# Altium PCB EVAL-AD7124.PcbDoc (part 1 of 2)
Units mil, origin at the board's own origin, x right, y up, seen from the top; angles counter-clockwise.
Board outline 2362.21 x 1574.8 mil, 4 copper layers (Top Layer, GND Layer, PWR Layer, Bottom Layer), stack 30.635 mil thick; 93 components, 57 nets, 234 pads, 171 vias.
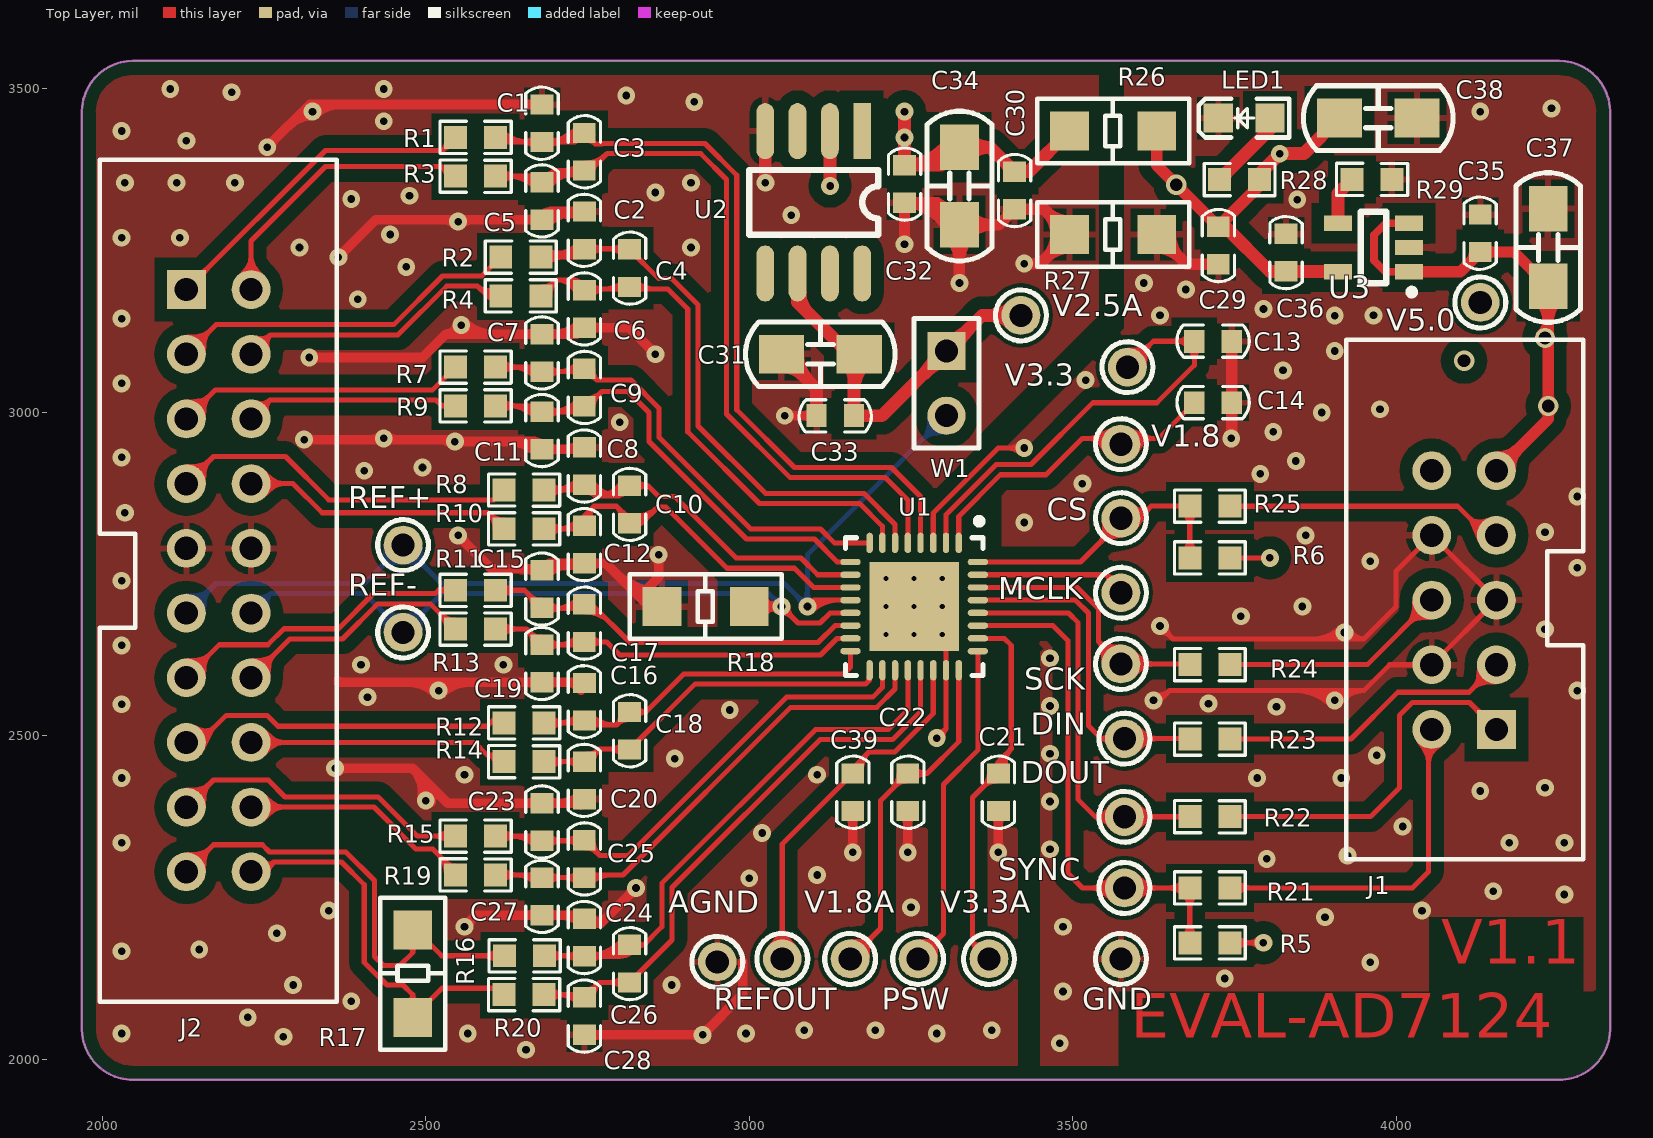
[diagram p0: Top Layer view]
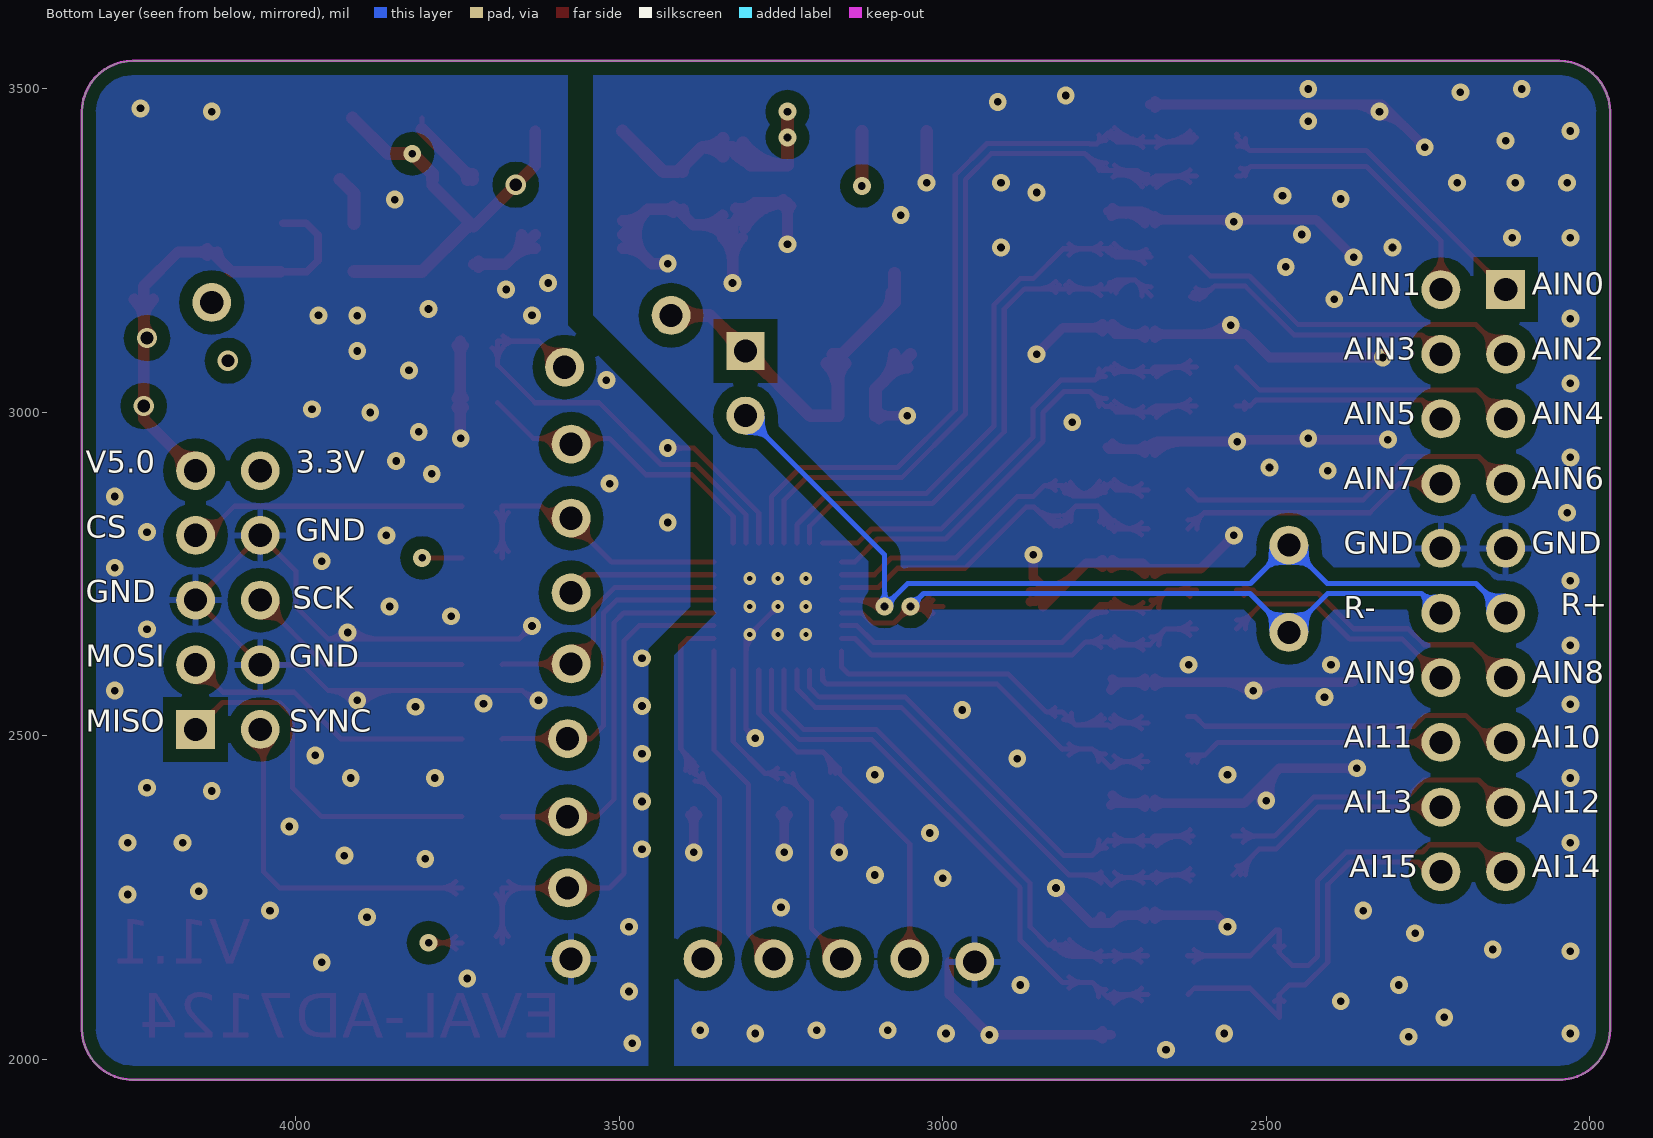
[diagram p1: Bottom Layer view, seen from below]
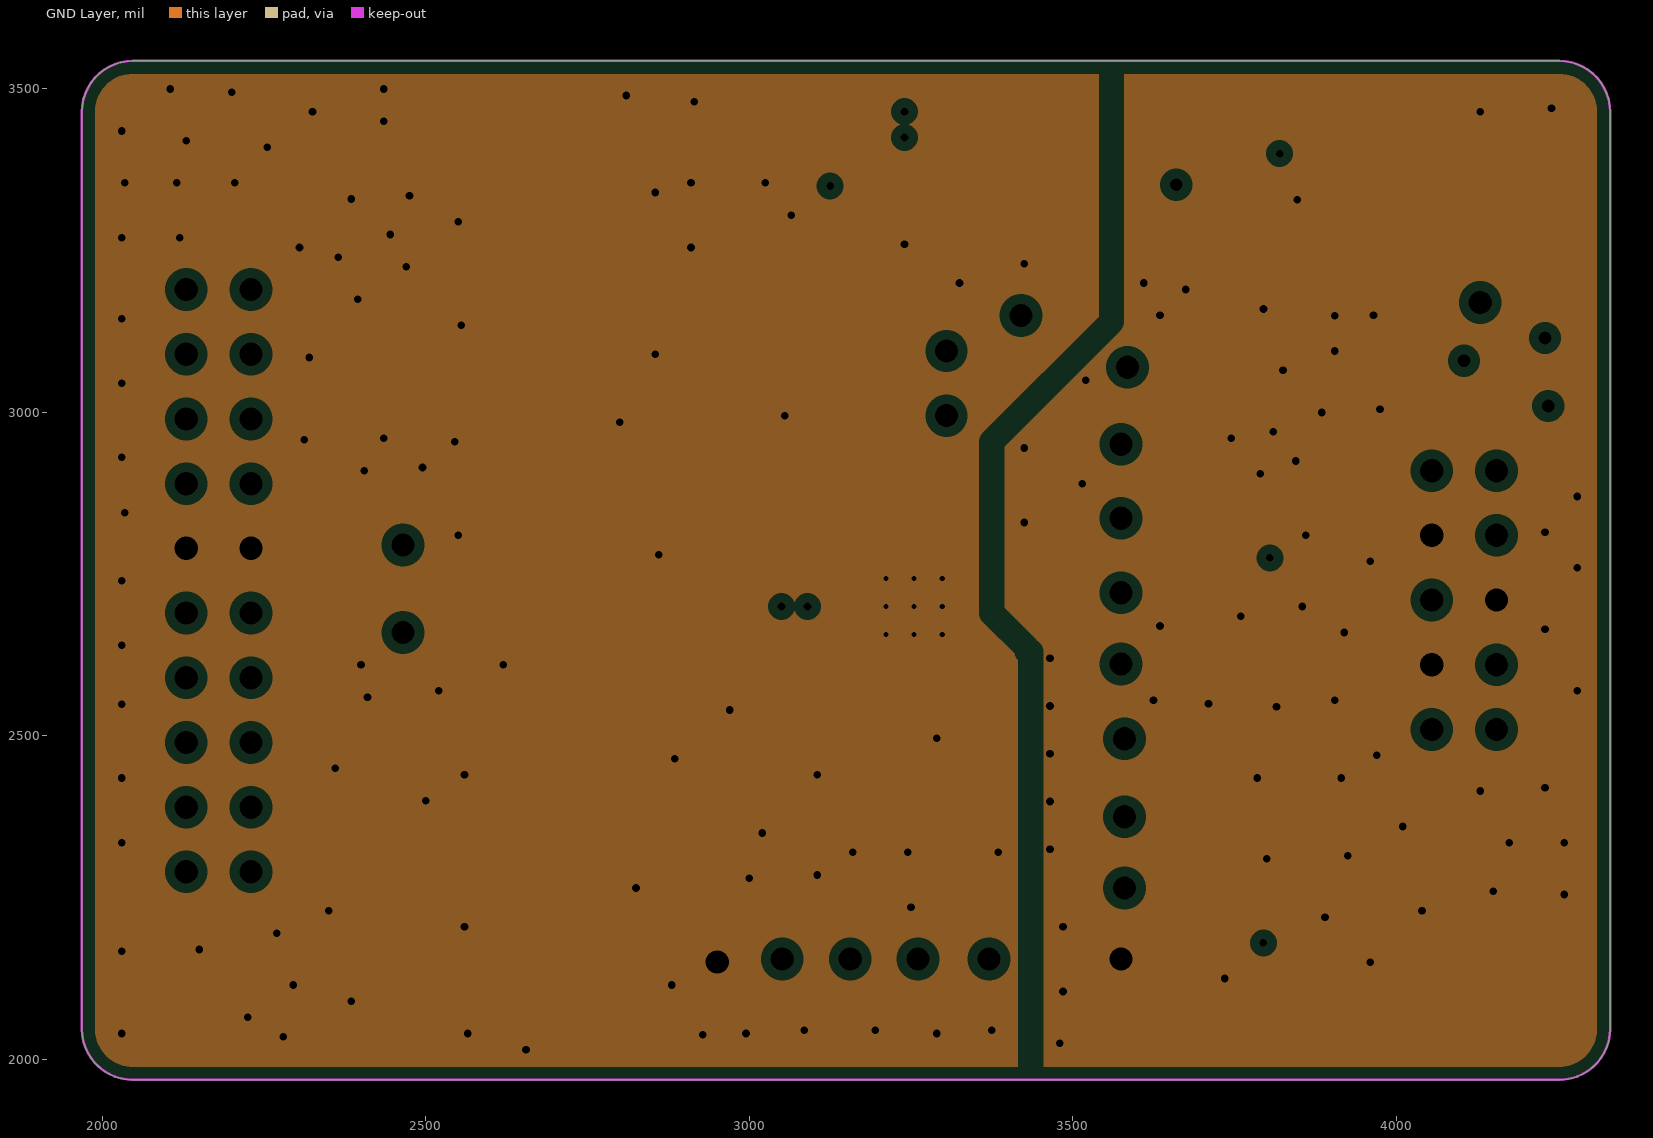
[diagram p2: GND Layer, clearances drawn from the general rule]
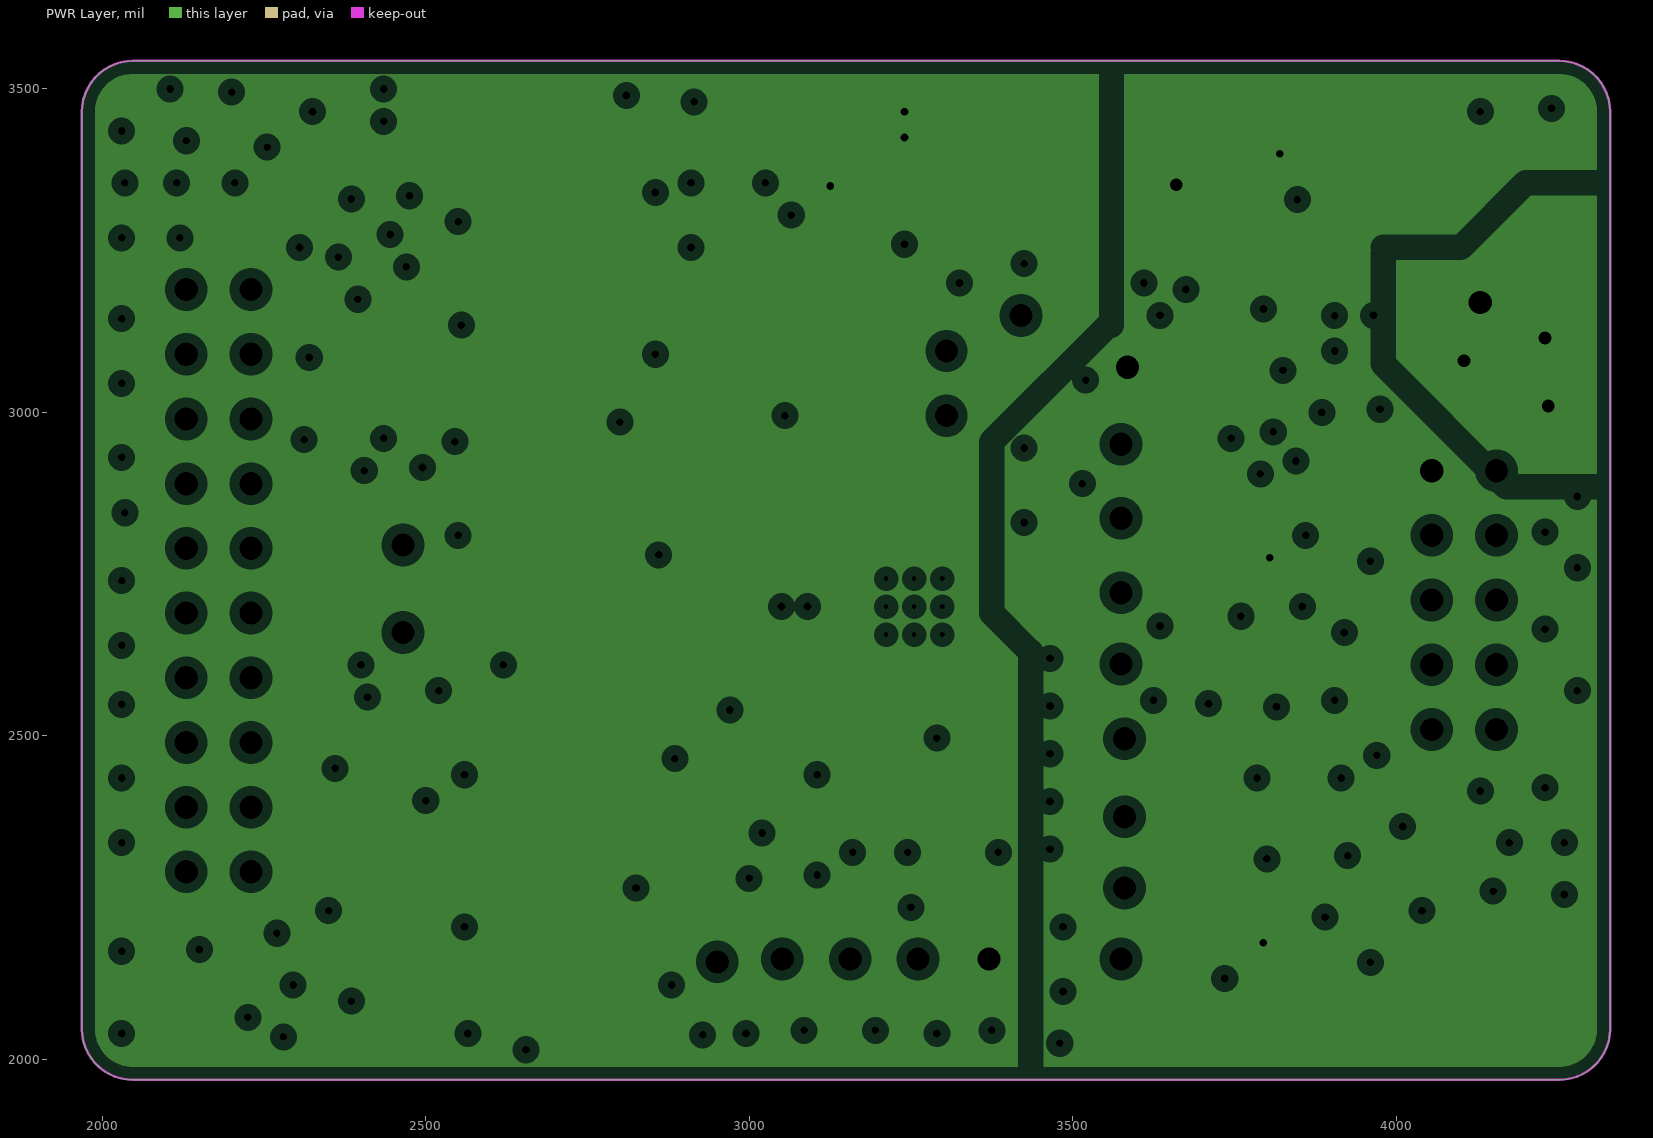
[diagram p3: PWR Layer, clearances drawn from the general rule]

## Layer stack, top to bottom
Top Solder: solder mask 0.4, Solder Resist, Dk 3.5
Top Layer: signal copper 1.4
Dielectric 1: core 10, FR-4, Dk 4.2
GND Layer: plane copper 1.4173, net (Multiple Nets)
Dielectric 4: prepreg 5, Dk 4.2
PWR Layer: plane copper 1.4173, net (Multiple Nets)
Dielectric 3: core 10, Dk 4.2
Bottom Layer: signal copper 1.4
Bottom Solder: solder mask 0.4, Solder Resist, Dk 3.5

## Board outline
2047.24,1968.5 cw(c2047.24,2047.24) 1968.5,2047.24 1968.5,3464.57 cw(c2047.24,3464.57) 2047.24,3543.31 4251.97,3543.31 cw(c4251.97,3464.57) 4330.71,3464.57 4330.71,2047.24 cw(c4251.97,2047.24) 4251.97,1968.5

## Design rules (kind name [scope] priority, off if disabled: settings)
Clearance Clearance_1 [InPolygon] p1: gap=19.68 ignorepadtopadclearanceinfootprint=FALSE except(0: Arc-Hole Track-Hole SMDPad-Hole THPad-Hole Via-Hole Fill-Hole Poly-Hole Region-Hole Text-Hole)
Clearance [All] p2: gap=7.87 ignorepadtopadclearanceinfootprint=FALSE except(0: Arc-Hole Track-Hole SMDPad-Hole THPad-Hole Via-Hole Fill-Hole Poly-Hole Region-Hole Text-Hole)
ComponentClearance [All] p1 off: gap=10 collisioncheckmode=3 verticalgap=3.94 showdistances=FALSE
DiffPairsRouting [All] p1: maxlimit=10 minlimit=7.87 mostfreqgap=7.87 toplayer_minwidth=5.91 toplayer_maxwidth=15 toplayer_prefwidth=7.87 bottomlayer_minwidth=5.91 bottomlayer_maxwidth=15 bottomlayer_prefwidth=7.87 maxuncoupledlength=500
PlaneClearance [All] p1: clearance=15
PlaneConnect [All] p1: planeconnectstyle=Direct reliefexpansion=20 reliefentries=4 reliefconductorwidth=10 reliefairgap=10
PolygonConnect PolygonConnect_1 [IsVia] p1: connectstyle=Direct reliefconductorwidth=10 reliefentries=4 polygonreliefangle="90 Angle" airgapwidth=10
PolygonConnect [All] p2: connectstyle=Relief reliefconductorwidth=10 reliefentries=4 polygonreliefangle="90 Angle" airgapwidth=10
RoutingVias [All] p1: holewidth=11.81 width=27.56 viastyle="Through Hole" minholewidth=7.87 minwidth=15.75 maxholewidth=28 maxwidth=39.37
SilkToSilkClearance [All] p1 off: silktosilkclearance=3.94
SilkToSolderMaskClearance [IsPad] p1 off: minsilkscreentomaskgap=10 clearancetoexposedcopper=TRUE
SolderMaskExpansion [All] p1: expansion=4
Width [All] p1: maxlimit=39.37 minlimit=5.91 preferedwidth=7.87
24 further rules are at their usual default settings.

## Components (designator, comment, footprint, x,y, rotation, side; value= is the part's Value field where it differs from the comment)
AGND "TP" "TP -DRILL" 2950.63,2150.76 r0 top
C1 "15pF" C0603 2680,3475 r270 top value=102
C2 "15pF" C0603 2745.47,3309.55 r270 top value=102
C3 "15pF" C0603 2745,3375 r90 top value=104
C4 "15pF" C0603 2815,3195 r90 top value=104
C5 "15pF" C0603 2680,3355 r270 top value=102
C6 "15pF" C0603 2745.47,3188.09 r270 top value=102
C7 "15pF" C0603 2680,3120 r270 top value=102
C8 "15pF" C0603 2745.47,2945.18 r270 top value=102
C9 "15pF" C0603 2745,3010.64 r90 top value=104
C10 "15pF" C0603 2815,2830 r90 top value=104
C11 "15pF" C0603 2680,3000 r270 top value=102
C12 "15pF" C0603 2745.47,2823.73 r270 top value=102
C13 "15pF" C0603 3745,3110 r180 top value=104
C14 "15pF" C0603 3745,3015 r180 top value=104
C15 "15pF" C0603 2680,2755 r270 top value=102
C16 "15pF" C0603 2745.47,2580.82 r270 top value=102
C17 "15pF" C0603 2745,2646.27 r90 top value=104
C18 "15pF" C0603 2815,2480 r90 top value=104
C19 "15pF" C0603 2680,2640 r270 top value=102
C20 "15pF" C0603 2745.47,2459.36 r270 top value=102
C21 "15pF" C0603 3385,2385 r90 top value=104
C22 "15pF" C0603 3245,2385 r90 top value=104
C23 "15pF" C0603 2680,2395 r270 top value=102
C24 "15pF" C0603 2745.47,2216.45 r270 top value=102
C25 "15pF" C0603 2745,2281.91 r90 top value=104
C26 "15pF" C0603 2815,2120 r90 top value=104
C27 "15pF" C0603 2680,2280 r270 top value=102
C28 "15pF" C0603 2745.47,2095 r270 top value=102
C29 "15pF" C0603 3725,3230 r90 top value=104
C30 "15pF" C0603 3410,3315 r90 top value=104
C31 "15pF" C1206 3110,3090 r0 top value=106
C32 "15pF" C0603 3240,3325 r90 top value=104
C33 "15pF" C0603 3105,2995 r0 top value=104
C34 "15pF" C1206 3325,3350 r90 top value=106
C35 "15pF" C0603 4130,3305 r270 top value=104
C36 "15pF" C0603 3830,3275 r270 top value=104
C37 "15pF" C1206 4235,3255 r270 top value=106
C38 "15pF" C1206 3972.3,3455 r180 top value=106
C39 "15pF" C0603 3160,2385 r90 top value=104
CS "TP" "TP -DRILL" 3574.62,2836.7 r90 top
DIN "TP" "TP -DRILL" 3580,2495.83 r90 top
DOUT "TP" "TP -DRILL" 3580,2375.04 r90 top
GND "TP" "TP -DRILL" 3574.62,2155.38 r0 top
J1 "Header 5X2" IDC10M 4105,2710 r90 top
J2 "Header 10X2" IDC20M 2180,2740 r270 top
LED1 "LED1" D0805 3765,3455 r180 top
MCLK "TP" "TP -DRILL" 3574.62,2721.28 r0 top
PSW "TP" "TP -DRILL" 3261.02,2155.38 r0 top
R1 "1K" R0603 2605,3425 r180 top
R2 "1K" R0603 2675,3240 r180 top
R3 "1K" R0603 2605,3365 r180 top
R4 "1K" R0603 2675,3180 r180 top
R5 "10K" R0603 3740,2180 r180 top
R6 "10K" R0603 3740,2775 r180 top
R7 "1K" R0603 2605,3070 r180 top
R8 "1K" R0603 2680,2880 r180 top
R9 "1K" R0603 2605,3010 r180 top
R10 "1K" R0603 2680,2820 r180 top
R11 "1K" R0603 2605,2725 r180 top
R12 "1K" R0603 2680,2520 r180 top
R13 "1K" R0603 2605,2665 r180 top
R14 "1K" R0603 2680,2460 r180 top
R15 "1K" R0603 2605,2345 r180 top
R16 "1K" R0603 2680.65,2160 r180 top
R17 "2K(NC)" R1206 2470,2125 r270 top
R18 "0R" R1206 2940,2690 r0 top
R19 "1K" R0603 2605,2285 r180 top
R20 "1K" R0603 2680,2100 r180 top
R21 "33R" R0603 3740,2265 r180 top
R22 "33R" R0603 3740,2375 r180 top
R23 "33R" R0603 3740,2495 r180 top
R24 "33R" R0603 3740,2610 r180 top
R25 "33R" R0603 3740,2855 r180 top
R26 "0R" R1206 3570,3425 r0 top
R27 "0R" R1206 3570,3265 r0 top
R28 "1K5" R0603 3730,3360 r0 top
R29 "0" R0603 3990.61,3360 r180 top
REF+ "TP" "TP -DRILL" 2465,2795 r90 top
REF- "TP" "TP -DRILL" 2465,2660 r90 top
REFOUT "TP" "TP -DRILL" 3051.02,2155.38 r0 top
SCK "TP" "TP -DRILL" 3574.62,2611.25 r90 top
SYNC "TP" "TP -DRILL" 3580,2265 r0 top
U1 "AD7124-8BCPZ" QFN32 3255,2700 r270 top
U2 "ADR4525BRZ" SO-8 3175,3435 r270 top
U3 "TPS78233" SOT-23-5 3965,3255 r0 top
V1.8 "TP" "TP -DRILL" 3574.62,2951.04 r0 top
V1.8A "TP" "TP -DRILL" 3156.02,2155.38 r0 top
V2.5A "TP" "TP -DRILL" 3420,3150 r0 top
V3.3 "TP" "TP -DRILL" 3584.62,3070 r0 top
V3.3A "TP" "TP -DRILL" 3370.63,2155.38 r0 top
V5.0 "TP" "TP -DRILL" 4130,3170 r90 top
W1 "Jumper" HDR1X2 3305,3095 r270 top

## Footprints (in the part's own frame and the unit in brackets; to place one, negate y for a bottom-side part, rotate by r counter-clockwise, add the part's x,y. Pads: shape width x height; smd on the part's side, far side on the other; paste and mask are expansions set on the pad)
C0603 [mm]
  rect 0.8x0.9 smd: 1(-0.025,0) 2(1.448,0)
  silkscreen extent -0.71,-0.64 2.13,0.63
C1206 [mil]
  rect 70x60 smd: 1(-60,0) 2(60,0)
  silkscreen extent -116,-50 116,50
D0805 [mil]
  rect 45x45 smd: 1(-40,0) 2(40,0)
  silkscreen extent -70,-30 70,30, body extent -39,-24 39,24, height 49
HDR1X2 [mm] "Connector; Header; 2 Position"
  rect 1.5x1.5 hole 0.9: 1(0,0)
  round 1.5 hole 0.9: 2(2.54,0)
  silkscreen extent -1.27,-1.27 3.81,1.27
IDC10M [mil]
  rect 60x60 hole 36: 1(-200,-50)
  round 60 hole 36: 2(-200,50) 3(-100,-50) 4(-100,50) 5(0,-50) 6(0,50) 7(100,-50) 8(100,50) 9(200,-50) 10(200,50)
  silkscreen extent -401,-184 402,182
IDC20M [mil] "简牛端子"
  rect 60x60 hole 36: 1(-450,-50)
  round 60 hole 36: 2(-450,50) 3(-350,-50) 4(-350,50) 5(-250,-50) 6(-250,50) 7(-150,-50) 8(-150,50) 9(-50,-50) 10(-50,50) 11(50,-50) 12(50,50) 13(150,-50) 14(150,50) 15(250,-50) 16(250,50) 17(350,-50) 18(350,50) 19(450,-50) 20(450,50)
  silkscreen extent -651,-184 651,182
QFN32 [mm] "QFN, 32-Leads, Body 5.00x5.00mm, Pitch 0.50mm, Thermal Pad 3.65x3.65mm, IPC Medium Density"
  oval 0.8x0.25 smd: 1(-2.5,1.75) 2(-2.5,1.25) 3(-2.5,0.75) 4(-2.5,0.25) 5(-2.5,-0.25) 6(-2.5,-0.75) 7(-2.5,-1.25) 8(-2.5,-1.75) 17(2.5,-1.75) 18(2.5,-1.25) 19(2.5,-0.75) 20(2.5,-0.25) 21(2.5,0.25) 22(2.5,0.75) 23(2.5,1.25) 24(2.5,1.75)
  oval 0.25x0.8 smd: 9(-1.75,-2.5) 10(-1.25,-2.5) 11(-0.75,-2.5) 12(-0.25,-2.5) 13(0.25,-2.5) 14(0.75,-2.5) 15(1.25,-2.5) 16(1.75,-2.5) 25(1.75,2.5) 26(1.25,2.5) 27(0.75,2.5) 28(0.25,2.5) 29(-0.25,2.5) 30(-0.75,2.5) 31(-1.25,2.5) 32(-1.75,2.5)
  rect 3.5x3.5 smd: 33(0,0)
  silkscreen extent -3.47,-2.7 2.7,2.7, body extent -2.55,-2.55 2.55,2.55, height 0.8
R0603 [mm]
  rect 0.9x0.9 smd: 1(-0.076,-0.006) 2(1.499,-0.006)
  silkscreen extent -0.69,-0.64 2.1,0.63
R1206 [mil]
  rect 60x60 smd: 1(-75,10) 2(60,10)
  silkscreen extent -125,-40 110,60
SO-8 [mm]
  rect 2.2x0.7 smd: 1(0.006,-0.007)
  oval 2.2x0.7 smd: 2(0.006,-1.277) 3(0.006,-2.547) 4(0.006,-3.817) 5(5.594,-3.817) 6(5.594,-2.547) 7(5.594,-1.277) 8(5.594,-0.007)
  silkscreen extent 1.53,-4.45 4.07,0.63
SOT-23-5 [mm]
  rect 1.1x0.6 smd: 1(1.4,-0.95) 2(1.4,0) 3(1.4,0.95) 4(-1.4,0.95) 5(-1.4,-0.95)
  silkscreen extent -0.5,-1.87 1.63,1.4
"TP -DRILL" [mil]
  round 60 hole 35.98: 1(0,0)
  silkscreen extent -39,-39 39,39

## Part data
AGND CS DIN DOUT GND MCLK PSW REF+ REF- REFOUT SCK SYNC V1.8 V1.8A V2.5A V3.3 V3.3A V5.0: library part Single_Hole
C1 C2 C3 C4 C5 C6 C7 C8 C9 C10 C11 C12 C13 C14 C15 C16 C17 C18 C19 C20 C21 C22 C23 C24 C25 C26 C27 C28 C29 C30 C31 C32 C33 C34 C35 C36 C37 C38 C39: library part Cap, "Capacitor", LatestRevisionDate=17-Jul-2002, LatestRevisionNote="Re-released for DXP Platform.", PackageDescription="Radial Cap, Thru-Hole; 2 Leads; 0.3 in Pin Spacing", PackageReference=RAD-0.3, Published=8-Jun-2000, Publisher="Altium Limited"
J1: "Header, 5-Pin, Dual row", LatestRevisionDate=17-Jul-2002, LatestRevisionNote="Re-released for DXP Platform.", Publisher="Altium Limited"
J2: "Header, 10-Pin, Dual row", LatestRevisionDate=17-Jul-2002, LatestRevisionNote="Re-released for DXP Platform.", Publisher="Altium Limited"
LED1: library part LED2, "Typical RED, GREEN, YELLOW, AMBER GaAs LED", LatestRevisionDate=17-Jul-2002, LatestRevisionNote="Re-released for DXP Platform.", PackageDescription="SM LED; 2 Flat Leads", PackageReference=3.2X1.6X1.1, PackageVersion=Feb-2002, Published=8-Jun-2000, Publisher="Altium Limited"
R1 R2 R3 R4 R5 R6 R7 R8 R9 R10 R11 R12 R13 R14 R15 R16 R17 R18 R19 R20 R21 R22 R23 R24 R25 R26 R27 R28 R29: library part Res1, "Resistor", LatestRevisionDate=17-Jul-2002, LatestRevisionNote="Re-released for DXP Platform.", PackageDescription="Axial Device, Thru-Hole; 2 Leads; 0.3 in Pin Spacing", PackageReference=AXIAL-0.3, Published=8-Jun-2000, Publisher="Altium Limited"
U3: library part CAT6219-330
W1: "Jumper Wire", LatestRevisionDate=17-Jul-2002, LatestRevisionNote="Re-released for DXP Platform.", PackageDescription="Radial Cap, Thru-Hole; 2 Leads; 0.2 in Pin Spacing", PackageReference=RAD-0.2, Published=24-Mar-1999, Publisher="Altium Limited"

## Via types
v1: diameter 27.56, hole 11.81, Top Layer to Bottom Layer, 158 vias
v2: diameter 19.68, hole 7.87, Top Layer to Bottom Layer, 9 vias
v3: diameter 31.5, hole 19.68, Top Layer to Bottom Layer, 4 vias

## Nets (pads, with @x,y where several pads share a name; then routed paths per layer and width w, separated by ;. In a path a pad name is that pad's centre, name@x,y a point inside that pad or via, vN(x,y) a via of type N, cw(c..) or ccw(c..) an arc to the next point about the centre after c; other vN are vias at no path point)
AD_CS: CS.1 R6.2 R25.2 U1.32 | length 553.2
  Top Layer w7.87: U1.32@3353.43,2768.9 3512.2,2768.9 CS.1@3580,2836.7 ; CS.1@3574.62,2836.7 CS.1@3580,2836.7 ; R6.2@3671.26,2784.98 ccw(c3647.73,2808.5) 3681,2808.5 ccw(c3714.27,2808.5) R6.2@3690.74,2784.98 ; R25.2@3671.26,2845.49 cw(c3647.73,2821.97) 3681,2821.97 cw(c3714.27,2821.97) R25.2@3690.74,2845.49 ; R6.2@3681,2775.24 R25.2@3681,2855.24 3621.29,2855.24 3602.76,2836.7 CS.1@3580,2836.7
AD_DIN: DIN.1 R23.2 U1.29 | length 518.5
  Top Layer w7.87: U1.29@3353.43,2709.84 3504.41,2709.84 3524.25,2690 3524.25,2515.75 3544.17,2495.83 DIN.1@3580,2495.83 3680.41,2495.83 R23.2@3681,2495.24
AD_DOUT: DOUT.1 R22.2 U1.28 | length 618.4
  Top Layer w7.87: U1.28@3353.43,2690.16 3493.35,2690.16 3508.5,2675 3508.5,2401.5 3534.96,2375.04 DOUT.1@3580,2375.04 3680.8,2375.04 R22.2@3681,2375.24
AD_SCK: R24.2 SCK.1 U1.30 | length 406.7
  Top Layer w7.87: U1.30@3353.43,2729.53 3507,2729.53 3540,2696.52 3540,2645.87 SCK.1@3574.62,2611.25 3679.99,2611.25 R24.2@3681,2610.24
AD_SYNC: R5.2 R21.2 SYNC.1 U1.27 | length 948.3
  Top Layer w7.87: U1.27@3353.43,2670.47 3469.53,2670.47 3492.76,2647.24 3492.76,2287.24 3515,2265 SYNC.1@3580,2265 3680.76,2265 R21.2@3681,2265.24 R5.2@3681,2180.24 ; 3647.16,2265 ccw(c3647.16,2299.07) R21.2@3671.26,2274.98 ; 3648.3,2265 cw(c3648.3,2232.54) 3671.26,2255.49 cw(c3647.73,2231.97) 3681,2231.97 cw(c3714.27,2231.97) R21.2@3690.74,2255.49 ; R5.2@3671.26,2189.98 ccw(c3647.73,2213.5) 3681,2213.5 ccw(c3714.27,2213.5) R5.2@3690.74,2189.98
AGND: AGND.1 C1.1 C2.1 C5.2 C6.2 C7.1 C8.1 C11.2 C12.2 C15.1 C16.1 C19.2 C20.2 C21.1 C22.1 C23.1 C24.1 C27.2 C28.2 C30.1 C31.1 C32.1 C33.1 C34.1 C39.1 J2.9 J2.10 R18.1 R27.1 U1.23 U1.33 U2.4 | length 7860.6
  Top Layer w7.87: U1.33@3255,2694.09 cw(c3255,2679.84) 3265.08,2689.92 cw(c3275.16,2700) U1.33@3260.91,2700 ; v2(3255,2700) v2(3298.31,2656.69) 3304.21,2650.79 U1.23@3304.21,2601.57 3304.21,2510.79 ; v1@3290,2490 v1(3290,2496.57) 3304.21,2510.79 ; v1@3291.23,2506.34 ccw(c3293.18,2521.82) 3304.21,2510.79 ; U1.33@3292.4,2656.69 ccw(c3278.14,2656.69) 3288.23,2666.77 ccw(c3298.31,2676.86) U1.33@3298.31,2662.6 ; U1.33@3294.13,2652.52 cw(c3269.79,2628.18) 3304.21,2628.18 ; U1.33@3299.7,2658.08 cw(c3288.8,2647.19) U1.33@3304.21,2647.19 ; v1@3299.77,2497.81 cw(c3315.24,2499.76) 3304.21,2510.79
  Top Layer w15: v1(2255,3410) 2321,3476 C1.1@2680,3476 ; v1@2255,3416.28 ccw(c2255,3431.44) 2265.72,3420.72 ccw(c2276.44,3410) v1@2261.28,3410 ; 2288.67,3443.67 cw(c2325,3407.35) v1@2325,3458.72 ; v1(2312,2958) v1@2545,2958 ; v1@2316.44,2953.56 cw(c2327.16,2942.84) 2327.16,2958 cw(c2327.16,2973.16) v1@2316.44,2962.44 ; v1(2320,3085) 2495,3085 2531,3121 ; v1@2324.44,3080.56 cw(c2335.16,3069.84) 2335.16,3085 cw(c2335.16,3100.16) v1@2324.44,3089.44 ; v1@2329.44,3460.56 cw(c2366.72,3423.28) 2366.72,3476 ; v1(2360,2450) 2480,2450 ; v1@2364.44,2445.56 cw(c2375.16,2434.84) 2375.16,2450 cw(c2375.16,2465.16) v1@2364.44,2454.44 ; 2365,2585 2367,2583 C19.2@2680,2583 2728,2583 C16.1@2740,2571 ; v1(2365,3240) 2423,3298 C5.2@2680,3298 2693,3311 C2.1@2745,3311 ; v1@2365,3246.28 ccw(c2365,3261.44) 2375.72,3250.72 ccw(c2386.44,3240) v1@2371.28,3240 ; 2415.01,2958 ccw(c2415.01,2979.99) v1@2430.56,2964.44 ; v1@2439.44,2964.44 ccw(c2454.99,2979.99) 2454.99,2958 ; 2473.46,2583 cw(c2473.46,2523.46) v1@2515.56,2565.56 ; v1@2493.88,2401.42 ccw(c2443.22,2413.21) 2480,2450 ; 2499.1,2430.9 cw(c2474.2,2406) v1@2508.49,2398.02 ; 2509.67,2583 cw(c2509.67,2559.67) v1@2526.17,2576.17 ; v1@2513.83,2576.17 cw(c2530.33,2559.67) 2530.33,2583 ; 2522.6,2958 cw(c2522.6,2932.6) v1@2540.56,2950.56 ; v1@2524.44,2565.56 cw(c2566.54,2523.46) 2566.54,2583 ; 2527.6,3298 cw(c2527.6,3272.6) v1@2545.56,3290.56 ; v1(2545,2955) 2668,2955 C11.2@2680,2943 2742.29,2943 C8.1@2745.47,2946.18 ; 2548.75,3121 ccw(c2548.75,3136.06) v1@2563.6,3133.55 ; v1@2548.81,3136.05 cw(c2531,3139.06) 2531,3121 ; v1@2548.83,3128.83 ccw(c2567.75,3147.75) 2567.75,3121 ; v1@2549.44,2950.56 cw(c2560.16,2939.84) 2560.16,2955 cw(c2560.16,2970.16) v1@2549.44,2959.44 ; v1@2550,2803.72 cw(c2550,2788.56) 2560.72,2799.28 cw(c2571.44,2810) v1@2556.28,2810 ; v1(2550,2810) 2601.67,2758.33 2677.67,2758.33 C15.1@2680,2756 2690.73,2766.73 C12.2@2745.47,2766.73 2778.27,2766.73 2845,2700 2845,2730 2860,2745 v1(2860,2780) ; v1@2554.44,3290.56 cw(c2572.4,3272.6) 2572.4,3298 ; v1@2559.44,3139.44 ccw(c2603.96,3183.96) 2603.96,3121 ; v1(2560,2205) 2578,2223 C27.2@2680,2223 2728,2223 2740,2211 2771,2211 ; v1@2560,2211.28 ccw(c2560,2226.44) 2570.72,2215.72 ccw(c2581.44,2205) v1@2566.28,2205 ; 2629.15,2955 cw(c2629.15,2894.12) C11.2@2672.2,2937.17 ; 2652.5,2758.33 cw(c2652.5,2730.47) C15.1@2672.2,2750.17 ; C11.2@2665.36,2955 cw(c2665.36,2930.33) C11.2@2682.81,2947.77 ; C27.2@2672.2,2217.17 ccw(c2658.12,2203.09) 2658.12,2223 ccw(c2658.12,2242.91) C27.2@2672.2,2228.83 ; C23.1@2672.2,2390.17 ccw(c2658.12,2376.09) 2658.12,2396 ccw(c2658.12,2415.91) C23.1@2672.2,2401.83 ; C19.2@2672.2,2577.17 ccw(c2658.12,2563.09) 2658.12,2583 ccw(c2658.12,2602.91) C19.2@2672.2,2588.83 ; C7.1@2672.2,3115.17 ccw(c2658.12,3101.09) 2658.12,3121 ccw(c2658.12,3140.91) C7.1@2672.2,3126.83 ; C5.2@2672.2,3292.17 ccw(c2658.12,3278.09) 2658.12,3298 ccw(c2658.12,3317.91) C5.2@2672.2,3303.83 ; C1.1@2672.2,3470.17 ccw(c2658.12,3456.09) 2658.12,3476 ccw(c2658.12,3495.91) C1.1@2672.2,3481.83 ; C5.2@2677.19,3302.77 cw(c2697.05,3282.92) C5.2@2697.05,3311 ; C27.2@2687.8,2217.17 cw(c2701.88,2203.09) 2701.88,2223 cw(c2701.88,2242.91) C27.2@2687.8,2228.83 ; C23.1@2687.8,2390.17 cw(c2701.88,2376.09) 2701.88,2396 cw(c2701.88,2415.91) C23.1@2687.8,2401.83 ; C19.2@2687.8,2577.17 cw(c2701.88,2563.09) 2701.88,2583 cw(c2701.88,2602.91) C19.2@2687.8,2588.83 ; C15.1@2687.8,2750.17 cw(c2727.78,2710.19) C12.2@2727.78,2766.73 ; C11.2@2687.8,2937.17 cw(c2701.88,2923.09) 2701.88,2943 cw(c2701.88,2962.91) C11.2@2687.8,2948.83 ; C7.1@2687.8,3115.17 cw(c2701.88,3101.09) 2701.88,3121 cw(c2701.88,3140.91) C7.1@2687.8,3126.83 ; C5.2@2687.8,3292.17 cw(c2733.27,3246.7) C2.1@2733.27,3311 ; 2699.23,3121 ccw(c2699.23,3175.36) C6.2@2737.67,3136.92 ; 2708.23,2396 ccw(c2708.23,2437.64) C20.2@2737.67,2408.2 ; 2710.2,2223 cw(c2710.2,2184.15) C24.1@2737.67,2211.62 ; 2713.72,2762.96 cw(c2722.47,2730.31) C12.2@2739.38,2759.58 ; 2715.91,2943 ccw(c2715.91,2973.77) C8.1@2737.67,2952.01 ; 2716.27,3306.44 cw(c2724.15,3277.02) C2.1@2739.38,3303.4 ; 2720.74,2583 cw(c2720.74,2559.05) C16.1@2737.67,2575.99 ; 2722.49,3311 cw(c2722.49,3289.53) C2.1@2737.67,3304.71 ; 2724.69,3311 ccw(c2724.69,3329.36) C2.1@2737.67,3316.38 ; 2726.44,2583 ccw(c2726.44,2598.88) C16.1@2737.67,2587.65 ; C12.2@2737.67,2760.89 ccw(c2723.59,2746.81) 2723.59,2766.73 ccw(c2723.59,2786.64) C12.2@2737.67,2772.56 ; C28.2@2740,2038 v1(2928,2038) 2990,2100 2990,2150.76 ; C20.2@2740,2393 2737,2396 C23.1@2680,2396 2534,2396 2480,2450 ; C6.2@2745,3133 2733,3121 C7.1@2680,3121 2531,3121 ; C6.2@2745.47,3131.09 2813.91,3131.09 v1(2855,3090) ; C28.2@2753.27,2032.17 cw(c2767.35,2018.09) 2767.35,2038 cw(c2767.35,2057.91) C28.2@2753.27,2043.83 ; C12.2@2753.27,2760.89 cw(c2767.35,2746.81) 2767.35,2766.73 cw(c2767.35,2786.64) C12.2@2753.27,2772.56 ; C6.2@2753.27,3125.26 cw(c2767.35,3111.18) 2767.35,3131.09 cw(c2767.35,3151) C6.2@2753.27,3136.92 ; C24.1@2754.85,2221.08 ccw(c2771,2228.98) 2771,2211 ; 2792.45,2752.55 ccw(c2865,2825.1) R18.1@2865,2722.5 ; 2818.05,2726.95 ccw(c2865,2773.89) R18.1@2865,2707.5 ; v1@2818.72,2265 cw(c2803.56,2265) 2814.28,2254.28 cw(c2825,2243.56) v1@2825,2258.72 ; v1(2825,2265) 2771,2211 ; v1@2848.72,3090 ccw(c2833.56,3090) 2844.28,3100.72 ccw(c2855,3111.44) v1@2855,3096.28 ; v1@2855.56,2775.56 cw(c2844.84,2764.84) 2860,2764.84 cw(c2875.16,2764.84) v1@2864.44,2775.56 ; v1@2923.56,2033.56 ccw(c2912.84,2022.84) 2912.84,2038 ccw(c2912.84,2053.16) v1@2923.56,2042.44 ; v1@2928,2044.28 ccw(c2928,2059.44) 2938.72,2048.72 ccw(c2949.44,2038) v1@2934.28,2038 ; v1(3055,2995) C33.1@3104,2995 ; v1@3059.44,2990.56 cw(c3070.16,2979.84) 3070.16,2995 cw(c3070.16,3010.16) v1@3059.44,2999.44 ; C33.1@3098.17,2989.17 ccw(c3084.09,2975.09) 3084.09,2995 ccw(c3084.09,3014.91) C33.1@3098.17,3000.83 ; C39.1@3154.17,2378.17 cw(c3140.09,2364.09) 3160,2364.09 cw(c3179.91,2364.09) C39.1@3165.83,2378.17 ; v1@3155.56,2324.44 ccw(c3144.84,2335.16) 3160,2335.16 ccw(c3175.16,2335.16) v1@3164.44,2324.44 ; v1(3160,2320) C39.1@3160,2384 ; C22.1@3239.17,2378.17 cw(c3225.09,2364.09) 3245,2364.09 cw(c3264.91,2364.09) C22.1@3250.83,2378.17 ; v1@3240.56,2324.44 ccw(c3229.84,2335.16) 3245,2335.16 ccw(c3260.16,2335.16) v1@3249.44,2324.44 ; v1(3245,2320) C22.1@3245,2384 ; C21.1@3379.17,2378.17 cw(c3365.09,2364.09) 3385,2364.09 cw(c3404.91,2364.09) C21.1@3390.83,2378.17 ; v1@3380.56,2324.44 ccw(c3369.84,2335.16) 3385,2335.16 ccw(c3400.16,2335.16) v1@3389.44,2324.44 ; v1(3385,2320) C21.1@3385,2384
  Top Layer w17.72: C32.1@3235.13,3319.13 cw(c3223.37,3307.37) 3240,3307.37 cw(c3256.63,3307.37) C32.1@3244.87,3319.13 ; v1(3240,3260) C32.1@3240,3324 ; C32.1@3246.84,3319.13 cw(c3258.6,3307.37) 3258.6,3324 cw(c3258.6,3340.63) C32.1@3246.84,3328.87 ; 3270.03,3324 cw(c3270.03,3264.63) C34.1@3322,3293.34 ; 3292.44,3322.56 cw(c3264.89,3295) C34.1@3303.86,3295 ; C34.1@3306.5,3284.77 ccw(c3240,3248.03) C32.1@3240,3324 ; C34.1@3310.05,3270.05 cw(c3273.96,3233.96) 3325,3233.96 cw(c3376.04,3233.96) C34.1@3339.95,3270.05 ; C34.1@3320.25,3315.6 cw(c3313.21,3346.2) 3291,3324 ; v1(3325,3200) C34.1@3325,3290 ; C34.1@3339.95,3275.05 cw(c3376.04,3238.96) 3376.04,3290 cw(c3376.04,3341.04) C34.1@3339.95,3304.95 ; C30.1@3394.88,3298.88 ccw(c3379.76,3314) C30.1@3401.14,3314 ; C30.1@3416.84,3309.13 cw(c3428.6,3297.37) 3428.6,3314 cw(c3428.6,3330.63) C30.1@3416.84,3318.87 ; v1@3420,3230 3450,3230 R27.1@3495,3275 3456,3314 C30.1@3410,3314 3386,3290 C34.1@3325,3290 ; R27.1@3495,3253.86 ccw(c3495,3202.82) 3458.91,3238.91 ccw(c3422.82,3275) 3473.86,3275 ccw(c3422.82,3275) 3458.91,3311.09 ccw(c3495,3347.18) R27.1@3495,3296.14 ; C32.1@3240,3324 3291,3324 ; 3291,3324 C34.1@3325,3290
  Top Layer w19.68: U2.4@3024.72,3434.76 3024.72,3355.28 v1(3025,3355) ; C31.1@3050,3090 3104,3036 C33.1@3104,2995 ; C31.1@3055,3069.84 cw(c3055,3033.25) 3080.88,3059.12 ; C31.1@3075.16,3090 ccw(c3135.89,3090) 3092.95,3047.05
  other v1: 2655,2015 2280,2035 2030,2040 2565,2040 2995,2040 3290,2040 3085,2045 3195,2045 3375,2045 2225,2065 2385,2090 2295,2115 2880,2115 2030,2167.22 2150,2170 2270,2195 2350,2230 3250,2235 3000,2280 3105,2285 2030,2335 3020,2350 2500,2400 2030,2435 2560,2440 3105,2440 2885,2465 2970,2540 2030,2548.89 2410,2560 2520,2570 2400,2610 2620,2610 2030,2640 2030,2740 2035,2845 2405,2910 2495,2915 2030,2930.56 2435,2960 2800,2985 2030,3045 2555,3135 2030,3145 2395,3175 2470,3225 3425,3230 2305,3255 2910,3255 2030,3270 2120,3270 2445,3275 2550,3295 3065,3305 2385,3330 2475,3335 2855,3340 2035,3355 2115,3355 2205,3355 2910,3355 2130,3420 2030,3435 2435,3450 2325,3465 2915,3480 2810,3490 2200,3495 2105,3500 2435,3500
  other v2: 3211.69,2656.69 3255,2656.69 3211.69,2700 3298.31,2700 3211.69,2743.31 3255,2743.31 3298.31,2743.31
AI0: J2.1 R1.2 | length 557.9
  Top Layer w7.87: J2.1@2130,3190 2345,3405 2525.76,3405 ; R1.2@2532.31,3423.69 cw(c2509.62,3421.14) 2525.76,3405 ; R1.2@2543.5,3427.74 R1.2@2546,3430.24 ; R1.2@2544.46,3411.54 ccw(c2541.91,3388.86) 2525.76,3405 ; R1.2@2546,3425.24 2525.76,3405
AI1: J2.2 R3.2 | length 474.4
  Top Layer w7.87: J2.2@2230,3190 2230,3265 2345,3380 2524.25,3380 ; 2527.42,3376.84 cw(c2515.82,3365.24) R3.2@2532.22,3365.24 ; R3.2@2539.77,3377.53 cw(c2533.72,3389.46) 2524.25,3380 ; R3.2@2546,3365.24 2539.02,3365.24 2524.25,3380
AI2: J2.3 R2.2 | length 548.2
  Top Layer w7.87: J2.3@2130,3090 2175.75,3135.75 2450.75,3135.75 2525.98,3210.98 2586.75,3210.98 R2.2@2616,3240.24
AI3: J2.4 R4.2 | length 541.3
  Top Layer w7.87: J2.4@2230,3090 2260,3120 2457.27,3120 2532.51,3195.24 2580,3195.24 ; 2587.01,3188.22 ccw(c2601.82,3203.03) R4.2@2612.88,3185.25 ; 2594.03,3181.21 ccw(c2607.2,3194.38) R4.2@2617.04,3178.56 ; R4.2@2603.36,3174.75 ccw(c2595,3171.13) 2595,3180.24 ; R4.2@2603.36,3185.72 cw(c2595,3189.35) 2595,3180.24 ; R4.2@2608.72,3191.94 cw(c2596.44,3211.67) 2580,3195.24 ; R4.2@2616,3180.24 2595,3180.24 ; 2580,3195.24 2595,3180.24
AI4: J2.5 R7.2 | length 449.2
  Top Layer w7.87: J2.5@2130,2990 2175,3035 2510.76,3035 R7.2@2546,3070.24
AI5: J2.6 R9.2 | length 354.3
  Top Layer w7.87: J2.6@2230,2990 2259.25,3019.25 2515.75,3019.25 2524.76,3010.24 ; R9.2@2533.42,3004.62 ccw(c2524.76,3000.76) 2524.76,3010.24 ; R9.2@2533.42,3015.85 cw(c2524.76,3019.71) 2524.76,3010.24 ; R9.2@2546.65,3010.24 R9.2@2546,3010.24 2524.76,3010.24
AI6: J2.7 R8.2 | length 542.3
  Top Layer w7.87: J2.7@2130,2890 2171.81,2931.81 2283.19,2931.81 2350,2865 2605.76,2865 R8.2@2621,2880.24
AI7: J2.8 R10.2 | length 472.2
  Top Layer w7.87: J2.8@2230,2890 2295,2890 2340,2845 2596.24,2845 R10.2@2621,2820.24 ; R10.2@2607.22,2820.24 ccw(c2573.95,2820.24) 2597.48,2843.76 ccw(c2621,2867.28) R10.2@2621,2834.02
AI8: J2.13 R11.2 | length 506.4
  Top Layer w7.87: J2.13@2130,2590 2181,2641 2256,2641 2280.75,2665.75 2365,2665.75 2419.25,2720 2514.76,2720 2520,2725.24 ; R11.2@2534.6,2717.5 ccw(c2520,2707.6) 2520,2725.24 ; R11.2@2534.6,2732.97 cw(c2520,2742.87) 2520,2725.24 ; R11.2@2546,2725.24 2520,2725.24
AI9: J2.14 R13.2 | length 431.7
  Top Layer w7.87: J2.14@2230,2590 2290,2650 2371.52,2650 2425.78,2704.25 2506.98,2704.25 R13.2@2546,2665.24 ; R13.2@2532.22,2665.24 ccw(c2498.95,2665.24) 2522.48,2688.76 ccw(c2546,2712.28) R13.2@2546,2679.02
AI10: J2.15 R12.2 | length 522.2
  Top Layer w7.87: J2.15@2130,2490 2150,2490 2191.81,2531.81 2254.83,2531.81 2271.64,2515 2595,2515 2610.24,2530.24 R12.2@2621.65,2530.24
AI11: J2.16 R14.2 | length 435.2
  Top Layer w7.87: J2.16@2230,2490 2575.24,2490 2595,2470.24 ; R14.2@2603.61,2470.24 cw(c2603.61,2458.68) R14.2@2615.12,2459.71 ; R14.2@2607.28,2459.01 ccw(c2595,2457.91) 2595,2470.24 ; R14.2@2621.65,2470.24 2595,2470.24
AI12: J2.17 R15.2 | length 526.4
  Top Layer w7.87: J2.17@2130,2390 2171.81,2431.81 2256.57,2431.81 2282.63,2405.75 2426.52,2405.75 2487.03,2345.24 R15.2@2551,2345.24 ; R15.2@2536.26,2335.49 ccw(c2512.73,2311.97) 2512.73,2345.24 ccw(c2512.73,2378.5) R15.2@2536.26,2354.98
AI13: J2.18 R19.2 | length 437.3
  Top Layer w7.87: J2.18@2230,2390 2420,2390 2485,2325 2511.24,2325 R19.2@2551,2285.24 ; 2518.94,2317.29 cw(c2486.88,2285.24) R19.2@2532.22,2285.24 ; 2531.01,2305.22 ccw(c2546,2320.21) R19.2@2546,2299.02 ; 2532.38,2303.85 cw(c2513.77,2285.24) R19.2@2540.09,2285.24
AI14: J2.19 R16.2 R17.1 | length 793.9
  Top Layer w7.87: J2.19@2130,2290 2171.81,2331.81 2247.32,2331.81 2258.38,2320.75 2376.52,2320.75 2420.75,2276.52 2420.75,2159.25 2435,2145 2460,2145 2480,2165 ; R17.1@2472.53,2175.03 cw(c2469.53,2165) 2480,2165 ; R17.1@2487.47,2175.03 ccw(c2490.47,2165) 2480,2165 ; R16.2@2611.9,2150.49 ccw(c2588.38,2126.97) 2588.38,2160.24 ccw(c2588.38,2193.5) R16.2@2611.9,2169.98 ; R16.2@2621.65,2160.24 2524.76,2160.24 2485,2200 R17.1@2480,2200 2480,2165
AI15: J2.20 R17.2 R20.2 | length 636.9
  Top Layer w7.87: J2.20@2230,2290 2250,2290 2265,2305 2370,2305 2405,2270 2405,2150 2440,2115 2465,2115 2480,2100 ; R17.2@2472.53,2089.97 ccw(c2469.53,2100) 2480,2100 ; R17.2@2487.47,2089.97 cw(c2490.47,2100) 2480,2100 ; R20.2@2621,2100.24 2611.24,2110 2525,2110 R17.2@2480,2065 2480,2100
AIN0: C1.2 C3.2 R1.1 U1.4 | length 1514.3
  Top Layer w7.87: R1.1@2608,3425.24 2615.24,3418 C1.2@2680,3418 2731,3418 C3.2@2745,3432 2762,3415 ; R1.1@2612.18,3429.41 ccw(c2639.73,3456.96) 2639.73,3418 ; R1.1@2617.74,3434.98 ccw(c2658.74,3475.97) 2658.74,3418 ; C1.2@2669.68,3409.65 ccw(c2649.52,3389.49) 2649.52,3418 ccw(c2649.52,3446.51) C1.2@2669.68,3426.35 ; C1.2@2680.72,3418 ccw(c2680.72,3494.31) C3.2@2734.68,3440.35 ; C1.2@2690.32,3409.65 cw(c2710.48,3389.49) 2710.48,3418 cw(c2710.48,3446.51) C1.2@2690.32,3426.35 ; 2699.73,3418 ccw(c2699.73,3475.3) C3.2@2740.25,3434.78 ; 2718.74,3418 ccw(c2718.74,3456.29) C3.2@2745.82,3429.22 ; C3.2@2747.88,3420.22 cw(c2749.26,3402.26) 2762,3415 ; C3.2@2758.35,3428.85 ccw(c2772.05,3425.05) 2762,3415 ; U1.4@3264.84,2798.43 3264.84,2870.16 3220,2915 3070,2915 2980.75,3004.25 2980.75,3366.65 2931.65,3415.75 2773.48,3415.75 2772.73,3415 2762,3415
AIN1: C3.1 C5.1 R3.1 U1.5 | length 1688.2
  Top Layer w7.87: R3.1@2608,3365.24 2670.76,3365.24 C5.1@2680,3356 2681,3356 2699,3374 ; R3.1@2617.74,3355.49 cw(c2641.27,3331.97) 2641.27,3365.24 cw(c2641.27,3398.5) R3.1@2617.74,3374.98 ; 2627.22,3365.24 cw(c2627.22,3305.19) C5.1@2669.68,3347.65 ; 2646.23,3365.24 cw(c2646.23,3324.2) C5.1@2675.25,3353.22 ; C5.1@2665.24,3365.24 cw(c2665.24,3343.21) C5.1@2680.82,3358.78 ; C5.1@2678.93,3358.5 cw(c2711.7,3331.6) 2711.7,3374 ; C5.1@2682.66,3367.79 ccw(c2683.92,3389.08) 2699,3374 ; C5.1@2685.01,3353.5 cw(c2728.35,3317.94) C3.1@2728.35,3374 ; C5.1@2691.1,3348.51 cw(c2745,3304.28) C3.1@2745,3374 ; C5.1@2693.65,3357.75 cw(c2712.42,3360.57) 2699,3374 ; 2710.9,3370.06 cw(c2717.55,3340.61) C3.1@2735.87,3364.61 ; 2714.44,3365.81 ccw(c2706.61,3395.03) C3.1@2732.8,3379.91 ; 2716.81,3366.45 cw(c2723.74,3340.58) C3.1@2737.13,3363.77 ; 2722.12,3372.59 ccw(c2718.27,3389.64) C3.1@2733.05,3380.31 ; C3.1@2734.68,3365.65 ccw(c2714.52,3345.48) 2714.52,3374 ccw(c2714.52,3402.51) C3.1@2734.68,3382.35 ; C3.1@2746.97,3377.94 ccw(c2746.97,3404.42) 2765.69,3385.69 ; C3.1@2746.97,3385.81 ccw(c2746.97,3431.3) 2779.13,3399.13 ; C3.1@2758.78,3374 cw(c2770.32,3374) C3.1@2762.16,3382.16 ; U1.5@3245.16,2798.43 3245.16,2864.84 3210.75,2899.25 3063.48,2899.25 2965,2997.73 2965,3360.13 2925.13,3400 2780,3400 2754,3374 C3.1@2745,3374 ; 2699,3374 C3.1@2745,3374
AIN2: C2.2 C4.2 R2.1 U1.6 | length 1198.8
  Top Layer w7.87: R2.1@2678,3240.24 2732.24,3240.24 2745,3253 2814,3253 C4.2@2815,3252 2860.25,3206.75 2880.52,3206.75 2920.75,3166.52 2920.75,2979.25 3025,2875 3177.27,2875 3225.47,2826.8 U1.6@3225.47,2798.43 ; R2.1@2681.04,3245.3 ccw(c2691.48,3262.66) 2696.38,3243 ; R2.1@2685.1,3252.05 ccw(c2705.33,3285.7) 2714.82,3247.6 ; R2.1@2685.27,3240.24 ccw(c2685.27,3310.78) C2.2@2735.15,3260.9 ; R2.1@2687.74,3230.49 cw(c2711.27,3206.97) 2711.27,3240.24 cw(c2711.27,3273.5) R2.1@2687.74,3249.98 ; R2.1@2689.81,3233.14 cw(c2713.18,3219.09) 2706.59,3245.55 ; 2704.28,3240.24 ccw(c2704.28,3291.77) C2.2@2740.72,3255.33 ; 2723.29,3240.24 ccw(c2723.29,3272.76) C2.2@2746.29,3249.76 ; C2.2@2755.79,3244.19 cw(c2777.05,3222.93) 2777.05,3253 ; C2.2@2755.79,3260.9 ccw(c2774.85,3279.96) 2774.85,3253 ; 2782.1,3253 cw(c2782.1,3221.07) C4.2@2804.68,3243.65 ; 2786.93,3253 ccw(c2786.93,3278.1) C4.2@2804.68,3260.35
AIN3: C4.1 C6.1 R4.1 U1.7 | length 1173
  Top Layer w7.87: R4.1@2678,3180.24 2702.76,3205 ; R4.1@2678,3194.02 ccw(c2678,3227.28) 2701.52,3203.76 ccw(c2725.05,3180.24) R4.1@2691.78,3180.24 ; 2714.34,3205 cw(c2714.34,3177.58) C6.1@2739.84,3187.65 ; 2725.91,3205 cw(c2725.91,3182.15) C6.1@2747.16,3190.54 ; C6.1@2732.51,3184.76 ccw(c2702.77,3173.02) 2702.77,3205 ; C6.1@2732.85,3194.19 ccw(c2724.29,3198.29) 2731,3205 ; C6.1@2742.44,3200.85 cw(c2741.15,3215.15) 2731,3205 ; C6.1@2755.79,3180.74 cw(c2780.56,3155.97) 2780.56,3191 ; C6.1@2755.79,3197.44 ccw(c2771.34,3212.99) 2771.34,3191 ; 2777.27,3191 ccw(c2777.27,3229.76) C4.1@2804.68,3202.35 ; 2791.76,3191 cw(c2791.76,3172.73) C4.1@2804.68,3185.65 ; 2796.28,3191 ccw(c2796.28,3210.75) C4.1@2810.25,3196.78 ; C4.1@2819.75,3196.78 ccw(c2833.72,3210.75) 2833.72,3191 ; C4.1@2825.32,3185.65 cw(c2838.24,3172.73) 2838.24,3191 ; C4.1@2825.32,3202.35 ccw(c2852.73,3229.76) 2852.73,3191 ; U1.7@3205.79,2798.43 3205.79,2824.21 3170.75,2859.25 3015.75,2859.25 2905,2970 2905,3160 2874,3191 2745,3191 2731,3205 ; 2702.76,3205 2731,3205
AIN4: C7.2 C9.2 R7.1 U1.8 | length 987.6
  Top Layer w7.87: R7.1@2608,3070.24 2672.76,3070.24 C7.2@2680,3063 2736,3063 2740,3067 2748,3067 2765,3050 ; R7.1@2617.74,3060.49 cw(c2641.27,3036.97) 2641.27,3070.24 cw(c2641.27,3103.5) R7.1@2617.74,3079.98 ; 2632.05,3070.24 cw(c2632.05,3017.02) C7.2@2669.68,3054.65 ; 2651.06,3070.24 cw(c2651.06,3036.03) C7.2@2675.25,3060.22 ; C7.2@2690.32,3054.65 cw(c2710.48,3034.49) 2710.48,3063 cw(c2710.48,3091.51) C7.2@2690.32,3071.35 ; 2703.32,3063 ccw(c2703.32,3107.34) C9.2@2734.68,3075.99 ; 2722.33,3063 ccw(c2722.33,3088.33) C9.2@2740.25,3070.42 ; 2725.71,3063 cw(c2725.71,3050.31) C9.2@2734.68,3059.28 ; C9.2@2748.25,3055.89 cw(c2750.48,3035.48) 2765,3050 ; C9.2@2758.75,3066.78 ccw(c2780.22,3065.23) 2765,3050 ; U1.8@3186.1,2798.43 3131.57,2798.43 3110,2820 3002.27,2820 2860.75,2961.52 2860.75,3006.52 2817.27,3050 2765,3050